# EAGLE board source_eagle (EAGLE 9.6.2)
REV: A
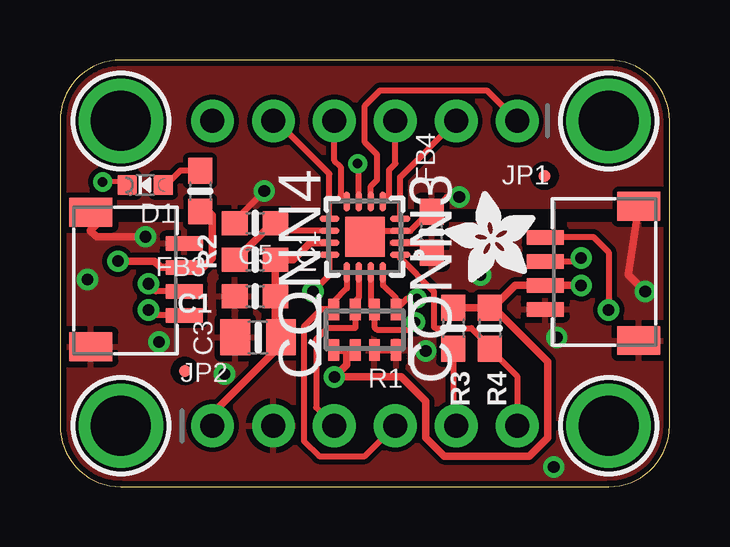
[diagram p0: board, top side]
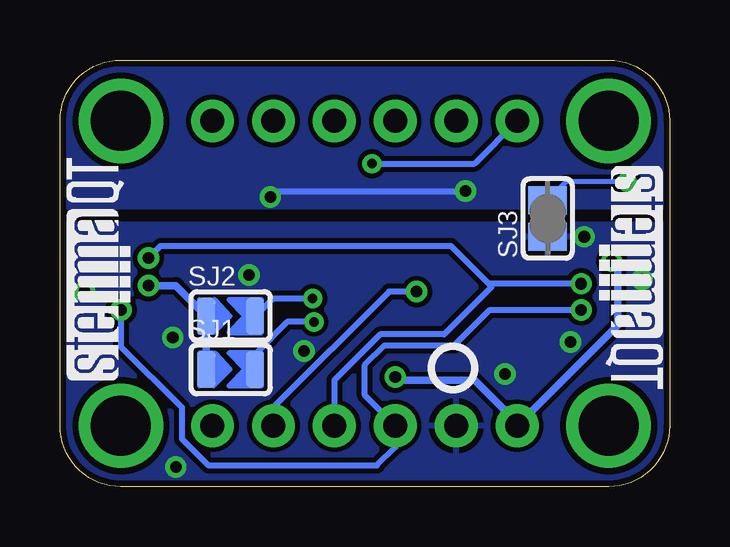
[diagram p1: board, bottom side, seen from below]

Size 25.4 x 17.78 mm. Coordinates in mm from the lower left corner, seen from the top.
Outline: 0,15.24 0,2.54 arc90 2.54,0 22.86,0 arc90 25.4,2.54 25.4,15.24 arc90 22.86,17.78 2.54,17.78 arc90 0,15.24
Copper layers (1*16): Top 0.035mm / dielectric 1.5mm / Bottom 0.035mm
Design rules "adafruit 7-7": minimum track width 6mil, minimum drill 15.5mil, track to track 8mil, track to pad 7mil, pad to pad 7mil, via to via 7mil, smd to smd 7mil, copper to edge 10mil, drill to drill 8mil, minimum pad ring 10mil, minimum via ring 8mil, stop-mask expansion 2mil, vias tented up to drill 20mil, thermal gap 10mil
Net classes: 1 highpower: width 0.305 mm, drill 0.483 mm; 2 lowpower: width 0.254 mm, drill 0.483 mm

## Footprints (pad centres in the part's own frame; a part is rotated, then mirrored left to right if it is on the bottom)
0603-NO = smd 1.075 x 1: 1 -0.85,0; 2 0.85,0
0805-NO = smd 1.24 x 1.5: 1 -0.95,0; 2 0.95,0
JST_SH4 = smd 0.6 x 1.55: 1 -1.5,2.006; 2 -0.5,2.006; 3 0.5,2.006; 4 1.5,2.006 | smd 1.2 x 1.8: MT1 -2.8,-1.894; MT2 2.8,-1.894
CHIPLED_0603_NOOUTLINE = smd 0.8 x 0.8: A 0,-0.75; C 0,0.75
FIDUCIAL_0.5MM = smd 0.5 x 0.5: 1 0,0
WQFN16 = smd 0.28 x 0.85: 1 -0.75,-1.475; 2 -0.25,-1.475; 3 0.25,-1.475; 4 0.75,-1.475; 9 0.75,1.475; 10 0.25,1.475; 11 -0.25,1.475; 12 -0.75,1.475 | smd 0.85 x 0.28: 5 1.475,-0.75; 6 1.475,-0.25; 7 1.475,0.25; 8 1.475,0.75; 13 -1.475,0.75; 14 -1.475,0.25; 15 -1.475,-0.25; 16 -1.475,-0.75 | smd 1.65 x 1.65: THERM 0,0
1X06_ROUND_70 = drill 1 pad 1.778: 1 -6.35,0; 2 -3.81,0; 3 -1.27,0; 4 1.27,0; 5 3.81,0; 6 6.35,0
RESPACK_4X0603 = smd 0.45 x 0.9: 1 -1.3,-0.85; 2 -0.4,-0.85; 3 0.4,-0.85; 4 1.3,-0.85; 5 1.3,0.85; 6 0.4,0.85; 7 -0.4,0.85; 8 -1.3,0.85
SOLDERJUMPER_ARROW_NOPASTE = smd 0.762 x 1.524: 1 -1.016,0; 2 1.016,0
SOLDERJUMPER_CLOSEDWIRE = smd 1.168 x 1.6: 1 -0.762,0; 2 0.762,0 | smd 0.635 x 0.203: WIRE 0,0
MOUNTINGHOLE_2.5_PLATED = drill 2.5 pad 3.2: P$1 0,0

## Placement (x,y rotation side)
C1  0.1uF  [0603-NO]  8.13,7.94 180 top
C3  10uF  [0805-NO]  8.26,6.22 180 top
C5  0.1uF  [0603-NO]  8.13,10.99 180 top
CONN3  STEMMA_I2C_QT  [JST_SH4]  22.23,8.89 90 top
CONN4  STEMMA_I2C_QT  [JST_SH4]  3.17,8.64 270 top
D1  GREEN  [CHIPLED_0603_NOOUTLINE]  3.56,12.57 90 top
FB3  FERRITE  [0603-NO]  8.13,9.46 180 top
FB4  FERRITE  [0603-NO]  15.49,10.6 90 top
FID3  FIDUCIAL_0.5MM  [FIDUCIAL_0.5MM]  5.21,4.83 0 top
FID4  FIDUCIAL_0.5MM  [FIDUCIAL_0.5MM]  20.19,12.95 0 top
IC1  ADC_ADS122C04RTE  [WQFN16]  12.7,10.41 90 top
JP1  [1X06_ROUND_70]  12.7,15.24 180 top
JP2  [1X06_ROUND_70]  12.7,2.54 0 top
PLABEL0  [PLABEL0]  6.35,0.89 0 top
PLABEL1  [PLABEL1]  16.64,0.89 0 top
PLABEL2  [PLABEL2]  9.02,4.19 0 top
PLABEL3  [PLABEL3]  11.56,0.89 0 top
PLABEL4  [PLABEL4]  14.1,4.19 0 top
PLABEL5  [PLABEL5]  19.3,4.19 0 top
PLABEL6  [PLABEL6]  12.7,13.34 0 top
PLABEL7  [PLABEL7]  0.38,12.45 0 top
PLABEL8  [PLABEL8]  6.1,16.89 0 top
PLABEL9  [PLABEL9]  8.89,16.89 0 top
PLABEL10  [PLABEL10]  11.56,16.89 0 top
PLABEL11  [PLABEL11]  13.97,16.89 0 top
PLABEL12  [PLABEL12]  16.64,16.89 0 top
PLABEL13  [PLABEL13]  19.81,16.89 0 top
PLABEL14  [PLABEL14]  13.34,13.21 0 bottom
PLABEL15  [PLABEL15]  21.78,10.22 0 bottom
PLABEL16  [PLABEL16]  12.45,0.89 0 bottom
PLABEL17  [PLABEL17]  21.84,4.57 0 bottom
PLABEL18  [PLABEL18]  21.84,6.86 0 bottom
PLABEL19  [PLABEL19]  16.26,6.35 0 bottom
R1  10K Pack  [RESPACK_4X0603]  12.7,6.54 180 top
R2  10K  [0603-NO]  5.84,12.32 270 top
R3  10K  [0603-NO]  16.38,6.6 270 top
R4  10K  [0603-NO]  17.91,6.6 270 top
SJ1  [SOLDERJUMPER_ARROW_NOPASTE]  18.29,4.89 0 bottom
SJ2  [SOLDERJUMPER_ARROW_NOPASTE]  18.29,7.11 0 bottom
SJ3  [SOLDERJUMPER_CLOSEDWIRE]  5.08,11.18 90 bottom
U$25  MOUNTINGHOLE2.5  [MOUNTINGHOLE_2.5_PLATED]  2.54,15.24 0 top
U$27  MOUNTINGHOLE2.5  [MOUNTINGHOLE_2.5_PLATED]  22.86,15.24 0 top
U$29  MOUNTINGHOLE2.5  [MOUNTINGHOLE_2.5_PLATED]  2.54,2.54 0 top
U$30  MOUNTINGHOLE2.5  [MOUNTINGHOLE_2.5_PLATED]  22.86,2.54 0 top
U$32  [ADAFRUIT_3.5MM]  19.81,8.51 90 top
U$33  [PCBFEAT-REV-040]  9.02,4.95 0 bottom
U$34  [STEMMAQT]  22.48,4.45 90 bottom
U$35  [STEMMAQT]  2.92,13.34 270 bottom

## Library data of the parts
C1 C3 C5 FB3 FB4 FID3 FID4 JP1 JP2 R1-R4 SJ3 U$32 U$33 = microbuilder
CONN3 CONN4 = adafruit_electromech; LCSC: C2845363
D1 = microbuilder; ROT: 270
IC1 = adafruit_sensor; ROT: 90
PLABEL0 PLABEL1-PLABEL19 = pinguin
SJ1 SJ2 = microbuilder; BOM: EXCLUDE
U$25 U$27 U$29 U$30 = adafruit_electromech; BOM: EXCLUDE
U$34 U$35 = silks

## Nets
!DRDY: IC1.12 JP2.5 R3.2
!RESET: IC1.1 JP2.6 R4.2
ADDR0: IC1.15 R1.2 SJ1.2
ADDR1: IC1.16 R1.1 SJ2.2
AGND: C5.2 FB4.2 IC1.3 IC1.THERM
AIN0: IC1.9 JP1.5
AIN1: IC1.8 JP1.4
AIN2: IC1.5 JP1.3
AIN3: IC1.4 JP1.2
AVDD: C5.1 FB3.2 IC1.10
GND: C1.2 C3.2 CONN3.1 CONN3.MT1 CONN3.MT2 CONN4.1 CONN4.MT1 CONN4.MT2 FB4.1 IC1.2 JP2.2 R1.7 R1.8 SJ3.1
N$1: D1.C SJ3.2
N$3: D1.A R2.1
REF_N: IC1.6 JP1.1
REF_P: IC1.7 JP1.6
SCL: CONN3.4 CONN4.4 IC1.14 JP2.3 R1.3
SDA: CONN3.3 CONN4.3 IC1.13 JP2.4 R1.4
VCC [highpower]: C1.1 C3.1 CONN3.2 CONN4.2 FB3.1 IC1.11 JP2.1 R1.5 R1.6 R2.2 R3.1 R4.1 SJ1.1 SJ2.1

## Tracks (layer width: path | path; a pad name or v marks a point on that pad's centre or on a via)
!DRDY  (via drill 0.48)
  Top 0.254: IC1.12 11.22,8.81 v10.54,8.13 | R3.2 16.38,2.67 JP2.5
  Bottom 0.254: v10.54,8.13 11.68,8.13 16.51,3.3 JP2.5
!RESET
  Top 0.254: JP2.6 19.05,4.61 R4.2 17.91,5.84 17.14,6.6 15.64,6.6 15.58,6.66 15.58,8.13 14.18,9.54 IC1.1
ADDR0  (via drill 0.39)
  Top 0.254: IC1.15 12.95,7.54 R1.2 13.1,6.65 13.21,6.54 14.49,6.54 v14.82,6.86
  Bottom 0.254: v14.82,6.86 15.93,6.86 17.27,5.52 SJ1.2
ADDR1  (via drill 0.39)
  Top 0.254: IC1.16 13.45,8.39 14,7.84 R1.1 14.45,7.84 v14.87,7.84
  Bottom 0.254: v14.87,7.84 16.54,7.84 SJ2.2
AGND  (via drill 0.48)
  Top 0.254: IC1.THERM 12.95,10.66 IC1.3 14.6,10.66 15.39,11.45 FB4.2 16.11,12.06 v16.64,12.06 | C5.2 7.28,11.09 v8.51,12.32
  Bottom 0.254: v16.64,12.06 16.38,12.32 v8.51,12.32
  pour Bottom: 0,17.78 25.4,17.78 25.4,11.68 0,11.68
  pour Top: 0,17.78 25.4,17.78 25.4,11.68 0,11.68
AIN0
  Top 0.254: IC1.9 11.22,13.03 9.02,15.24 JP1.5
AIN1
  Top 0.254: IC1.8 11.7,12.14 11.7,13.32 11.43,13.59 JP1.4
AIN2
  Top 0.254: IC1.5 13.7,12.14 13.7,13.2 13.97,13.46 JP1.3
AIN3
  Top 0.254: IC1.4 14.18,12.9 JP1.2
AVDD
  Top 0.254: IC1.10 9.3,10.66
  Top 0.305: 9.3,10.66 C5.1 8.85,10.99 7.32,9.46 FB3.2
GND  (via drill 0.48)
  Top 0.254: R1.7 R1.8
  Top 0.305: IC1.2 15.09,10.16 FB4.1 | CONN4.MT1 1.53,10.93 1.27,10.67 1.52,10.41 v3.56,10.41 | CONN3.MT2 23.68,8.83 v24.38,8.13
  other vias: 17.53,8.83 15.24,5.65 20.7,6.22 1.14,8.64 6.86,4.7 20.57,0.83 4.13,6.03
  pour Top: 0,10.92 25.4,10.92 25.4,0 0,0
  pour Bottom: 0,10.92 25.4,10.92 25.4,0 0,0
N$1  (via drill 0.39)
  Top 0.203: D1.C 2.68,12.7 v1.78,12.7
  Bottom 0.203: v1.78,12.7 4.32,12.7 SJ3.2
N$3
  Top 0.254: R2.1 5.02,13.17 4.42,12.57 D1.A
REF_N
  Top 0.254: IC1.6 12.95,12.52 13.2,12.78 13.2,13.85 12.7,14.35 12.7,15.88 13.34,16.51 17.78,16.51 JP1.1
REF_P  (via drill 0.39)
  Top 0.254: IC1.7 12.45,13.41 v12.4,13.46
  Bottom 0.254: v12.4,13.46 8.13,13.46 JP1.6
SCL  (via drill 0.48)
  Top 0.254: IC1.14 12.45,7.88 12.3,7.73 R1.3 12.3,6.6 11.13,6.6 10.67,6.14 10.67,3.3 JP2.3 | CONN4.4 3.91,7.14 v3.68,7.37 | CONN3.4 19.73,10.41 22.23,10.41 22.86,9.78 v22.86,7.37
  Bottom 0.254: v3.68,7.37 7.49,7.37 8.97,5.89 11.88,5.89 12.69,5.07 12.69,3.8 JP2.3 11.43,1.65 12.19,0.89 19.21,0.89 20.32,2 20.32,3.3 22.86,5.84 v22.86,7.37
SDA  (via drill 0.48)
  Top 0.254: IC1.13 11.95,8.27 11.4,7.72 R1.4 10.89,7.39 10.16,6.66 10.16,1.91 10.79,1.27 12.7,1.27 JP2.4 | CONN4.3 4,8.14 v3.68,8.46 | CONN3.3 21.58,9.39 v21.72,9.53
  Bottom 0.254: v3.68,8.46 7.54,8.46 | JP2.4 13.97,4.45 12.06,6.35 9.4,6.35 7.42,8.33 7.54,8.46 | v21.72,9.53 21.21,10.03 9.12,10.03 7.54,8.46
VCC  (via drill 0.48)
  Top 0.305: IC1.11 10.42,10.16 9.72,9.46 FB3.1 C1.1 8.98,6.45 C3.1 9.21,5.9 6.35,3.05 JP2.1 | R2.2 6.18,11.47 6.35,11.3 6.35,9.53 5.96,9.14 CONN4.2 4.2,9.14 3.94,9.4 v2.41,9.4 | R1.5 11.94,5.69 | 11.94,5.69 R1.6 | 11.94,5.69 11.94,5.08 v11.43,4.57 14.22,4.57 15.24,3.56 15.24,2.03 16,1.27 19.56,1.27 20.32,2.03 20.32,5.21 18.05,7.47 | R3.1 R4.1 17.99,7.54 18.05,7.47 | 18.05,7.47 18.97,8.39 CONN3.2 21.71,8.39 v21.72,8.38
  Bottom 0.305: v11.43,4.57 11.3,4.45 8.13,4.45 6.35,2.67 JP2.1 2.16,6.73 2.16,9.14 v2.41,9.4 | SJ1.1 SJ2.1 20.57,8.38 v21.72,8.38

## Text on the board
Pinguin_tBackup: Ref+ | A0 | A1 | A2 | A3 | Ref- | ADS122C04 | on | GND | SDA | !RST | VIN | SCL | DRDY
Pinguin_bBackup: ADS122C04 | 24-bit 4x Channel / I2C ADC w/PGA | Def I2C Addr 0x40 | A1 | A0 | VLogic/Vcc: 2.5~5VDC